# Altium PCB BOARD.PcbDoc
Units mm, origin at the board's own origin, x right, y up, seen from the top; angles counter-clockwise.
Board outline 17 x 22.5 mm, 2 copper layers (Top Layer, Bottom Layer), stack 1.18 mm thick; 11 components, 8 nets, 28 pads, 20 vias.
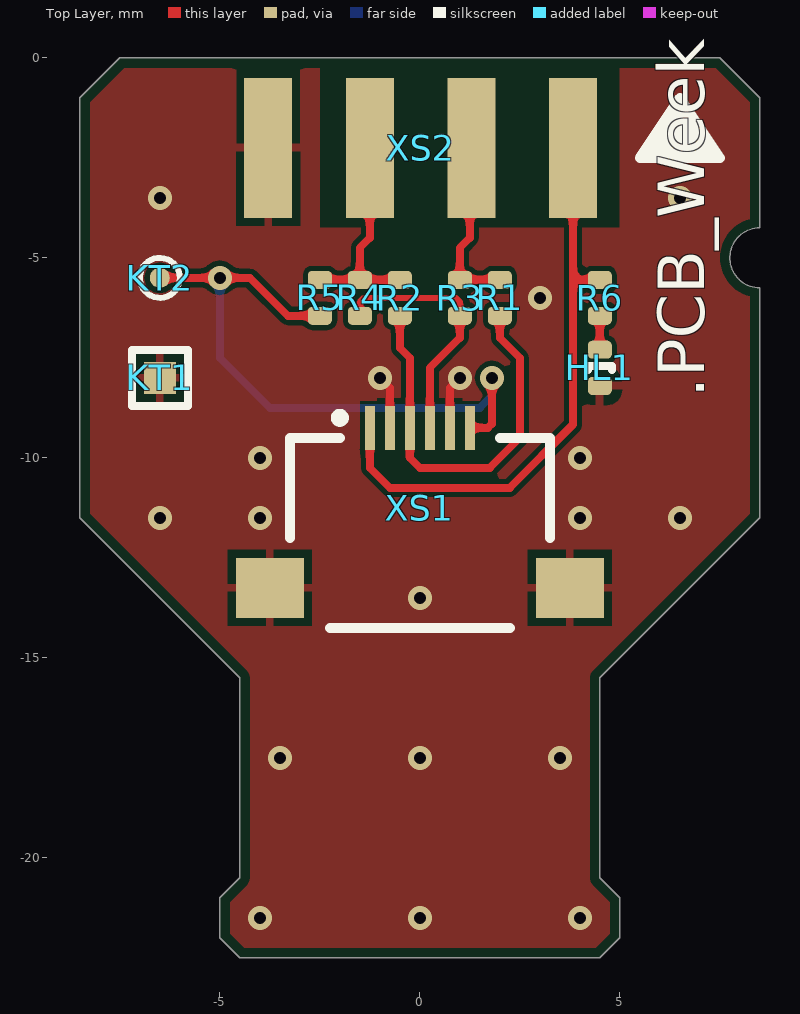
[diagram p0: Top Layer view]
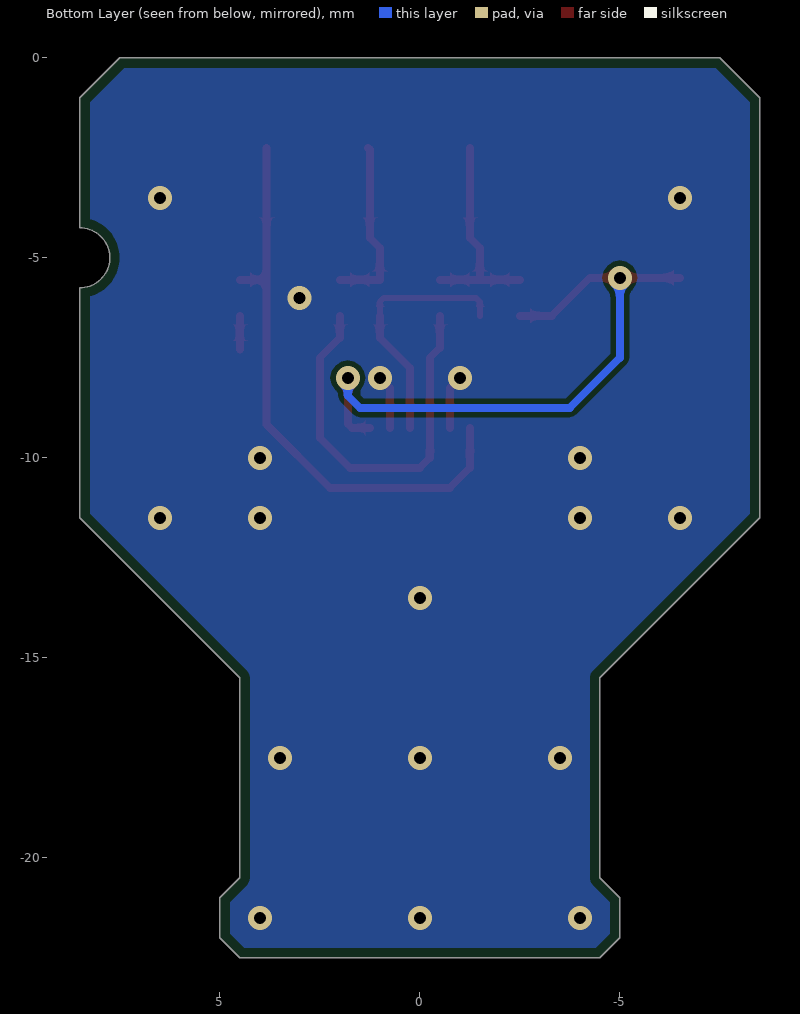
[diagram p1: Bottom Layer view, seen from below]

## Layer stack, top to bottom
Top Solder: solder mask 0.01, Solder Resist, Dk 3.5
Top Layer: signal copper 0.03
Dielectric1: core 1.12, FR-4, Dk 4.2
Bottom Layer: signal copper 0.03
Bottom Solder: solder mask 0.01, Solder Resist, Dk 3.5

## Board outline
-5,-22 -4.5,-22.5 4.5,-22.5 5,-22 5,-21 4.5,-20.5 4.5,-15.5 8.5,-11.5 8.5,-5.75 cw(c8.5,-5) 8.5,-4.25 8.5,-1 7.5,0 -7.5,0 -8.5,-1 -8.5,-11.5 -4.5,-15.5 -4.5,-20.5 -5,-21

## Design rules (kind name [scope] priority, off if disabled: settings)
BoardOutlineClearance [All] p1: gap=0.25 ignorepadtopadclearanceinfootprint=FALSE
Clearance [All] p1: gap=0.127 ignorepadtopadclearanceinfootprint=FALSE
ComponentClearance [All] p1 off: gap=0.25 collisioncheckmode=3 verticalgap=0.25 showdistances=FALSE
DiffPairsRouting [All] p1: maxlimit=0.4 minlimit=0.15 mostfreqgap=0.25 toplayer_minwidth=0.2 toplayer_maxwidth=0.4 toplayer_prefwidth=0.25 bottomlayer_minwidth=0.2 bottomlayer_maxwidth=0.4 bottomlayer_prefwidth=0.25 maxuncoupledlength=12
Height [All] p1: minheight=0 maxheight=25 prefheight=25
HoleSize [All] p1: absolutevalues=TRUE maxlimit=6 minlimit=0.3 maxpercent=80.000 minpercent=20.000
HoleToHoleClearance [All] p1: gap=0.25 allowstackedmicrovias=TRUE
MinimumSolderMaskSliver [All] p1 off: minsoldermaskwidth=0.254
PlaneClearance [All] p1: clearance=0.5
PlaneConnect [All] p1: planeconnectstyle=Relief reliefexpansion=0.5 reliefentries=4 reliefconductorwidth=0.25 reliefairgap=0.25
PolygonConnect PolygonConnect_DirectConnect [InComponentClass('DirectConnect')] p1: connectstyle=Direct reliefconductorwidth=0.254 reliefentries=4 polygonreliefangle="90 Angle" airgapwidth=0.254
PolygonConnect PolygonConnect_Components [InComponent('C*') OR InComponent('R*') OR InComponent('NR*') OR InComponent('DA*') OR InComponent('DD*') OR InComponent('HL*')] p2: connectstyle=Relief reliefconductorwidth=0.2 reliefentries=4 polygonreliefangle="90 Angle" airgapwidth=0.25
PolygonConnect PolygonConnect_Connectors [All vs (InPadClass('All Pads'))] p3: connectstyle=Relief reliefconductorwidth=0.2 reliefentries=4 polygonreliefangle="90 Angle" airgapwidth=0.2
PolygonConnect PolygonConnect_Via [All] p4: connectstyle=Direct reliefconductorwidth=0.254 reliefentries=4 polygonreliefangle="90 Angle" airgapwidth=0.254
RoutingCorners [All] p1: cornerstyle=45-Degree minsetback=1.5 maxsetback=3.5
RoutingVias [All] p1: holewidth=0.6 width=1.2 viastyle="Through Hole" minholewidth=0.3 minwidth=0.6 maxholewidth=1 maxwidth=2
SMDEntry [All] p1: side=TRUE corner=TRUE anyangle=TRUE
SilkToSilkClearance [All] p1 off: silktosilkclearance=0.254
SilkToSolderMaskClearance [IsPad] p1 off: minsilkscreentomaskgap=0.254 clearancetoexposedcopper=TRUE
SolderMaskExpansion [All] p1: expansion=0.05
Width [All] p1: maxlimit=8 minlimit=0.15 preferedwidth=0.6
Width Width_TrackEnds [All] p2 off: maxlimit=0.25 minlimit=0.25 preferedwidth=0.25 checkconnectedcopper=TRUE
19 further rules are at their usual default settings.

## Components (designator, comment, footprint, x,y, rotation, side; value= is the part's Value field where it differs from the comment)
HL1 "TVCC" LD0402_L 4.5,-7.75 r270 top value=KPHHS-1005QBC-D-V
KT1 "Text" TP-SMT-R-0.8mm -6.5,-8 r0 top value=TestPoint-SMT
KT2 "SWO" TP-SMT-C-0.5mm -6.5,-5.5 r0 top value=TestPoint-SMT
R1 "Resistor" R0402_L 2,-6 r90 top value=0
R2 "Resistor" R0402_L -0.5,-6 r90 top value=0
R3 "Resistor" R0402_L 1,-6 r90 top value=0
R4 "Resistor" R0402_L -1.5,-6 r90 top value=0
R5 "Resistor" R0402_L -2.5,-6 r90 top value=0
R6 "Resistor" R0402_L 4.5,-6 r90 top value=10k
XS1 "DEBUG" XF2M-0615-1A 0,-11.5 r180 top locked value=XF2M-0615-1A
XS2 "PBS-4_S" PBS-4 0,0 r0 top locked value=PBS-4

## Footprints (in the part's own frame and the unit in brackets; to place one, negate y for a bottom-side part, rotate by r counter-clockwise, add the part's x,y. Pads: shape width x height; smd on the part's side, far side on the other; paste and mask are expansions set on the pad)
LD0402_L [mm] "Chip Led; Body 1.0 x 0.5 mm (LxW typ)"
  rrect50% 0.45x0.6 smd mask+0.05: 1(-0.452,0) 2(0.452,0)
  silkscreen extent -0.05,-0.3 0.05,0.3, body extent -0.5,-0.3 0.5,0.3, height 0.2
PBS-4 [mm]
  rect 1.2x3.5 smd: 1(3.83,-2.25) 2(1.29,-2.25) 3(-1.25,-2.25) 4(-3.79,-2.25)
  body extent -5.08,-3.5 5.08,8.15, height 1.62
R0402_L [mm] "Chip Resistor; Body 1.0 x 0.5 mm (LxW typ)"
  rrect50% 0.45x0.6 smd: 1(-0.45,0) 2(0.45,0)
  body extent -0.5,-0.26 0.5,0.26, height 0.36
TP-SMT-C-0.5mm [mm]
  round 0.5 smd paste-1: 1(0,0)
  silkscreen extent -0.5,-0.5 0.5,0.5
TP-SMT-R-0.8mm [mm]
  rect 0.8x0.8 smd paste-1: 1(0,0)
  silkscreen extent -0.7,-0.7 0.7,0.7
XF2M-0615-1A [mm]
  rect 0.25x1.1 smd mask+0.025: 1(1.25,-2.25) 2(0.75,-2.25) 3(0.25,-2.25) 4(-0.25,-2.25) 5(-0.75,-2.25) 6(-1.25,-2.25)
  rect 1.7x1.5 smd mask+0.025: SH(-3.75,1.75) SH(3.75,1.75)
  silkscreen extent -3.25,-2.6 3.25,2.75, body extent -3.55,-3.2 3.55,2.7, height 2

## Part data
HL1: library part KPHHS-1005QBC-D-V, Color=Blue, Forward Current=20mA, Forward Voltage=3.3V, Manufacturer=Kingbright, Power Dissipation=120mW, Working Temperature Max=+85°С, Working Temperature Min=-40°С, Application Category=1, ID=24, Leds=1, Luminous Flux=60, Part Number=KPHHS-1005QBC-D-V, Published=03.12.2013, Publisher="Andrew Danich", Type="Индикатор единичный"
KT1: library part TestPoint-SMT-GND, Manufacturer=-, Application Category=1, Application Type="On PCB Test Point", Functional Analog=-, ID=7, Part Number=TestPoint-SMT-GND, Published=03.03.2015, Publisher="Andrew Danich"
KT2: library part TestPoint-SMT, Manufacturer=-, Application Category=1, Application Type="On PCB Test Point", Functional Analog=-, ID=6, Part Number=TestPoint-SMT, Published=03.03.2015, Publisher="Andrew Danich"
R1 R2 R3 R4 R5: library part RC0402JR-070RL, Limit Voltage=50V, Manufacturer=Yageo, Temperature Coefficient=100ppm, Tolerance=±5%, Total Power Dissipation=0.1W, Working Temperature Max=+155°С, Working Temperature Min=-55°С, Application Category=1, ID=362, Part Number=RC0402JR-070RL, Published=24.03.2010, Publisher="Andrew Danich", Series Type=Thick-Film, Type=Резистор
R6: library part RC0402JR-0710KL, Limit Voltage=50V, Manufacturer=Yageo, Temperature Coefficient=100ppm, Tolerance=±5%, Total Power Dissipation=0.1W, Working Temperature Max=+155°С, Working Temperature Min=-55°С, Application Category=1, ID=476, Part Number=RC0402JR-0710KL, Published=24.03.2010, Publisher="Andrew Danich", Series Type=Thick-Film, Type=Резистор
XS1: library part XF2M-0615-1A, Limit Current=500mA, Limit Voltage=50V, Manufacturer="Omron Electronics", Resistance=0.05ohm, Working Temperature Max=+85°С, Working Temperature Min=-30°С, Application Category=1, Connector Type=Female, ID=6, Part Number=XF2M-0615-1A, Pins=6, Pitch=0.5mm, Published=16.02.2017, Publisher="Viktor Klishin", Series=FPC, Type=Розетка
XS2: Published=07.09.2015, Publisher="Andrew Danich", Type=Розетка

## Via types
v1: diameter 0.6, hole 0.3, Top Layer to Bottom Layer, tented both sides, 20 vias

## Nets (pads, with @x,y where several pads share a name; then routed paths per layer and width w, separated by ;. In a path a pad name is that pad's centre, name@x,y a point inside that pad or via, vN(x,y) a via of type N, cw(c..) or ccw(c..) an arc to the next point about the centre after c; other vN are vias at no path point)
DEBUG_RX: R1.1 R2.1 XS1.3 | length 10.1
  Top Layer w0.2: R2.1 -0.5,-7.25 -0.25,-7.5 XS1.3 -0.25,-10 0,-10.25 1.75,-10.25 2.5,-9.5 2.5,-7.5 2,-7 R1.1
DEBUG_TX: R3.1 R4.1 XS1.4 | length 6.4
  Top Layer w0.15: R4.1 -1.5,-6.1 -1.4,-6 0.9,-6 1,-6.1 R3.1
  Top Layer w0.2: XS1.4 0.25,-7.75 1,-7 R3.1
GND: HL1.2 KT1.1 XS1.2 XS1.5 XS1.SH XS2.4 | length 2.7
  Top Layer w0.2: v1(-1,-8) -0.75,-8.25 XS1.2 ; XS1.5 0.75,-8.25 v1(1,-8)
  other v1: -4,-21.5 0,-21.5 4,-21.5 -3.5,-17.5 0,-17.5 3.5,-17.5 0,-13.5 -6.5,-11.5 -4,-11.5 4,-11.5 6.5,-11.5 -4,-10 4,-10 3.006,-6 -6.5,-3.5 6.5,-3.5
NetHL1_1: HL1.1 R6.1 | length 0.8
  Top Layer w0.2: HL1.1 R6.1
NetR1_2: R1.2 R3.2 XS2.2 | length 4.4
  Top Layer w0.2: XS2.2 1.25,-2.29 1.25,-4.5 1,-4.75 R3.2 R1.2
NetR2_2: R2.2 R4.2 R5.2 XS2.3 | length 5.4
  Top Layer w0.2: R5.2 R4.2 ; XS2.3 -1.25,-4.5 -1.5,-4.75 R4.2 ; R2.2 R4.2
TRACE_SWO: KT2.1 R5.1 XS1.6 | length 16
  Top Layer w0.2: KT2.1 v1(-5,-5.5) -4.25,-5.5 -3.3,-6.45 R5.1 ; XS1.6 1.7,-9.25 1.8,-9.15 v1(1.8,-8)
  Bottom Layer w0.2: v1(-5,-5.5) -5,-7.5 -3.75,-8.75 1.5,-8.75 1.8,-8.45 v1(1.8,-8)
TVCC: R6.2 XS1.1 XS2.1 | length 14.5
  Top Layer w0.2: XS1.1 -1.25,-10.25 -0.75,-10.75 2.25,-10.75 3.83,-9.17 3.83,-5.55 ; XS2.1 3.83,-5.55 ; R6.2 3.83,-5.55

## Polygon pours and split planes (outlines as drawn)
no net on Bottom Solder "GND_L02_P-001" (solid, remove dead copper): 13.25,12.75
GND on Bottom Layer "GND_L02_P006" (solid, remove dead copper, pour order 6): -8.5,0 8.5,0 8.5,-22.5 -8.5,-22.5
GND on Top Layer "GND_L01_P008" (solid, remove dead copper, pour order 8): -8.5,0 8.5,0 8.5,-22.5 -8.5,-22.5

## Other copper
Top Layer:
  pour cut-out: -2.5,0 5,0 5,-4.25 -2.5,-4.25

## Silkscreen, mask and mechanical layers (free items; w line width, h text height)
Top Overlay:
  region: 6.5,-1 5.5,-2.5 7.5,-2.5
  lines w0.25: 5.5,-2.5 6.5,-1 7.5,-2.5 5.5,-2.5
  text ".PCB_Week" at 7.5,-8.5 h2 r90
1 - Board Outline:
  the board outline again, w0.25